# Altium PCB WiirdFlex Top Alignment.PcbDoc
Units mm, origin at the board's own origin, x right, y up, seen from the top; angles counter-clockwise.
Board outline 77.75 x 78.75 mm, 2 copper layers (Top Layer, Bottom Layer); 8 components, 1 nets, 135 pads, 0 vias.
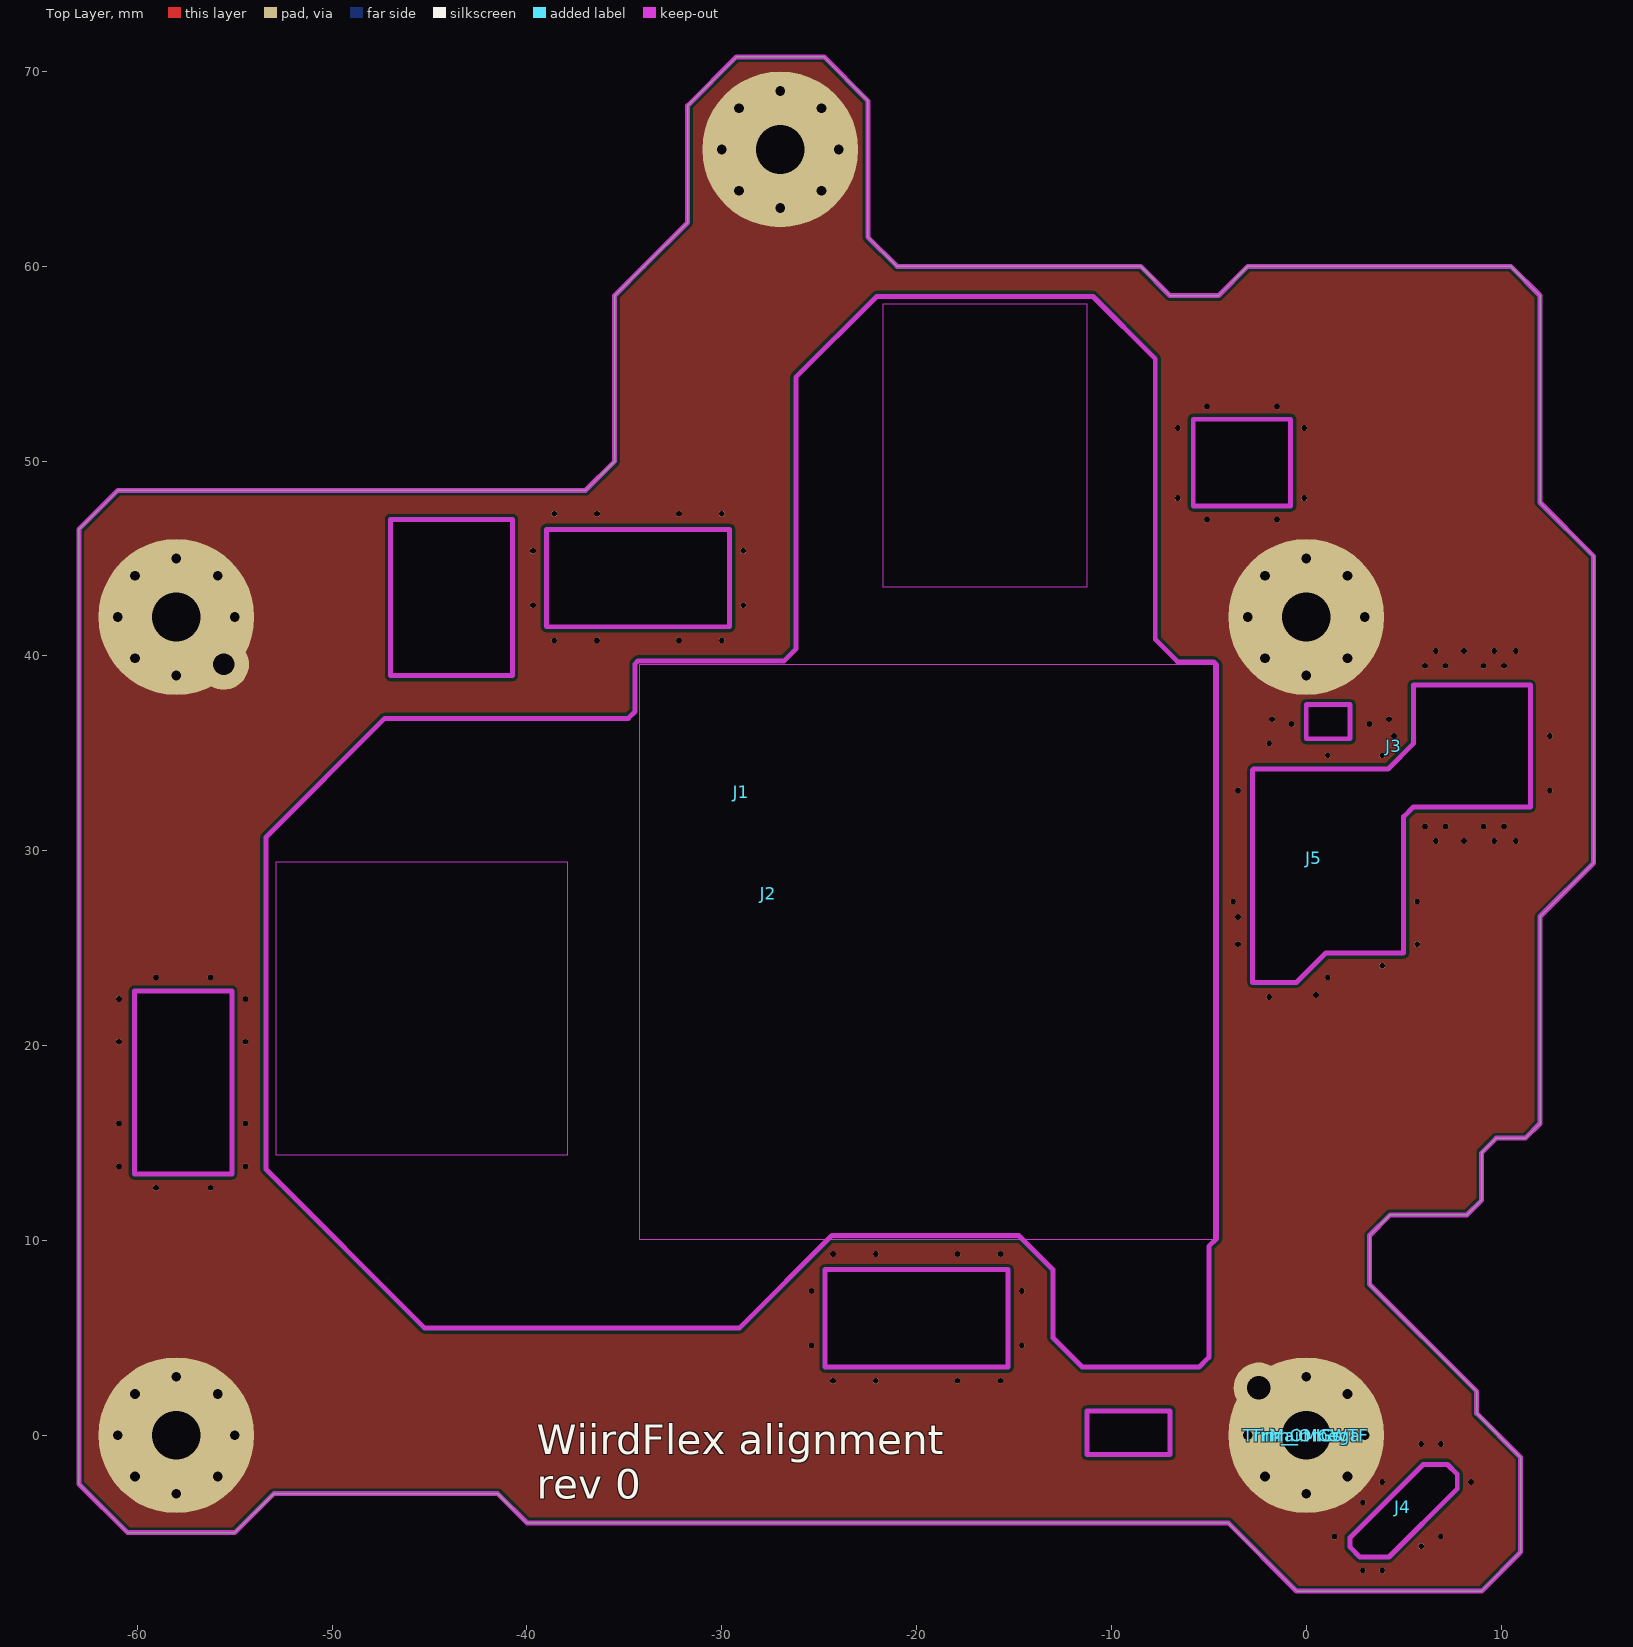
[diagram p0: Top Layer view]
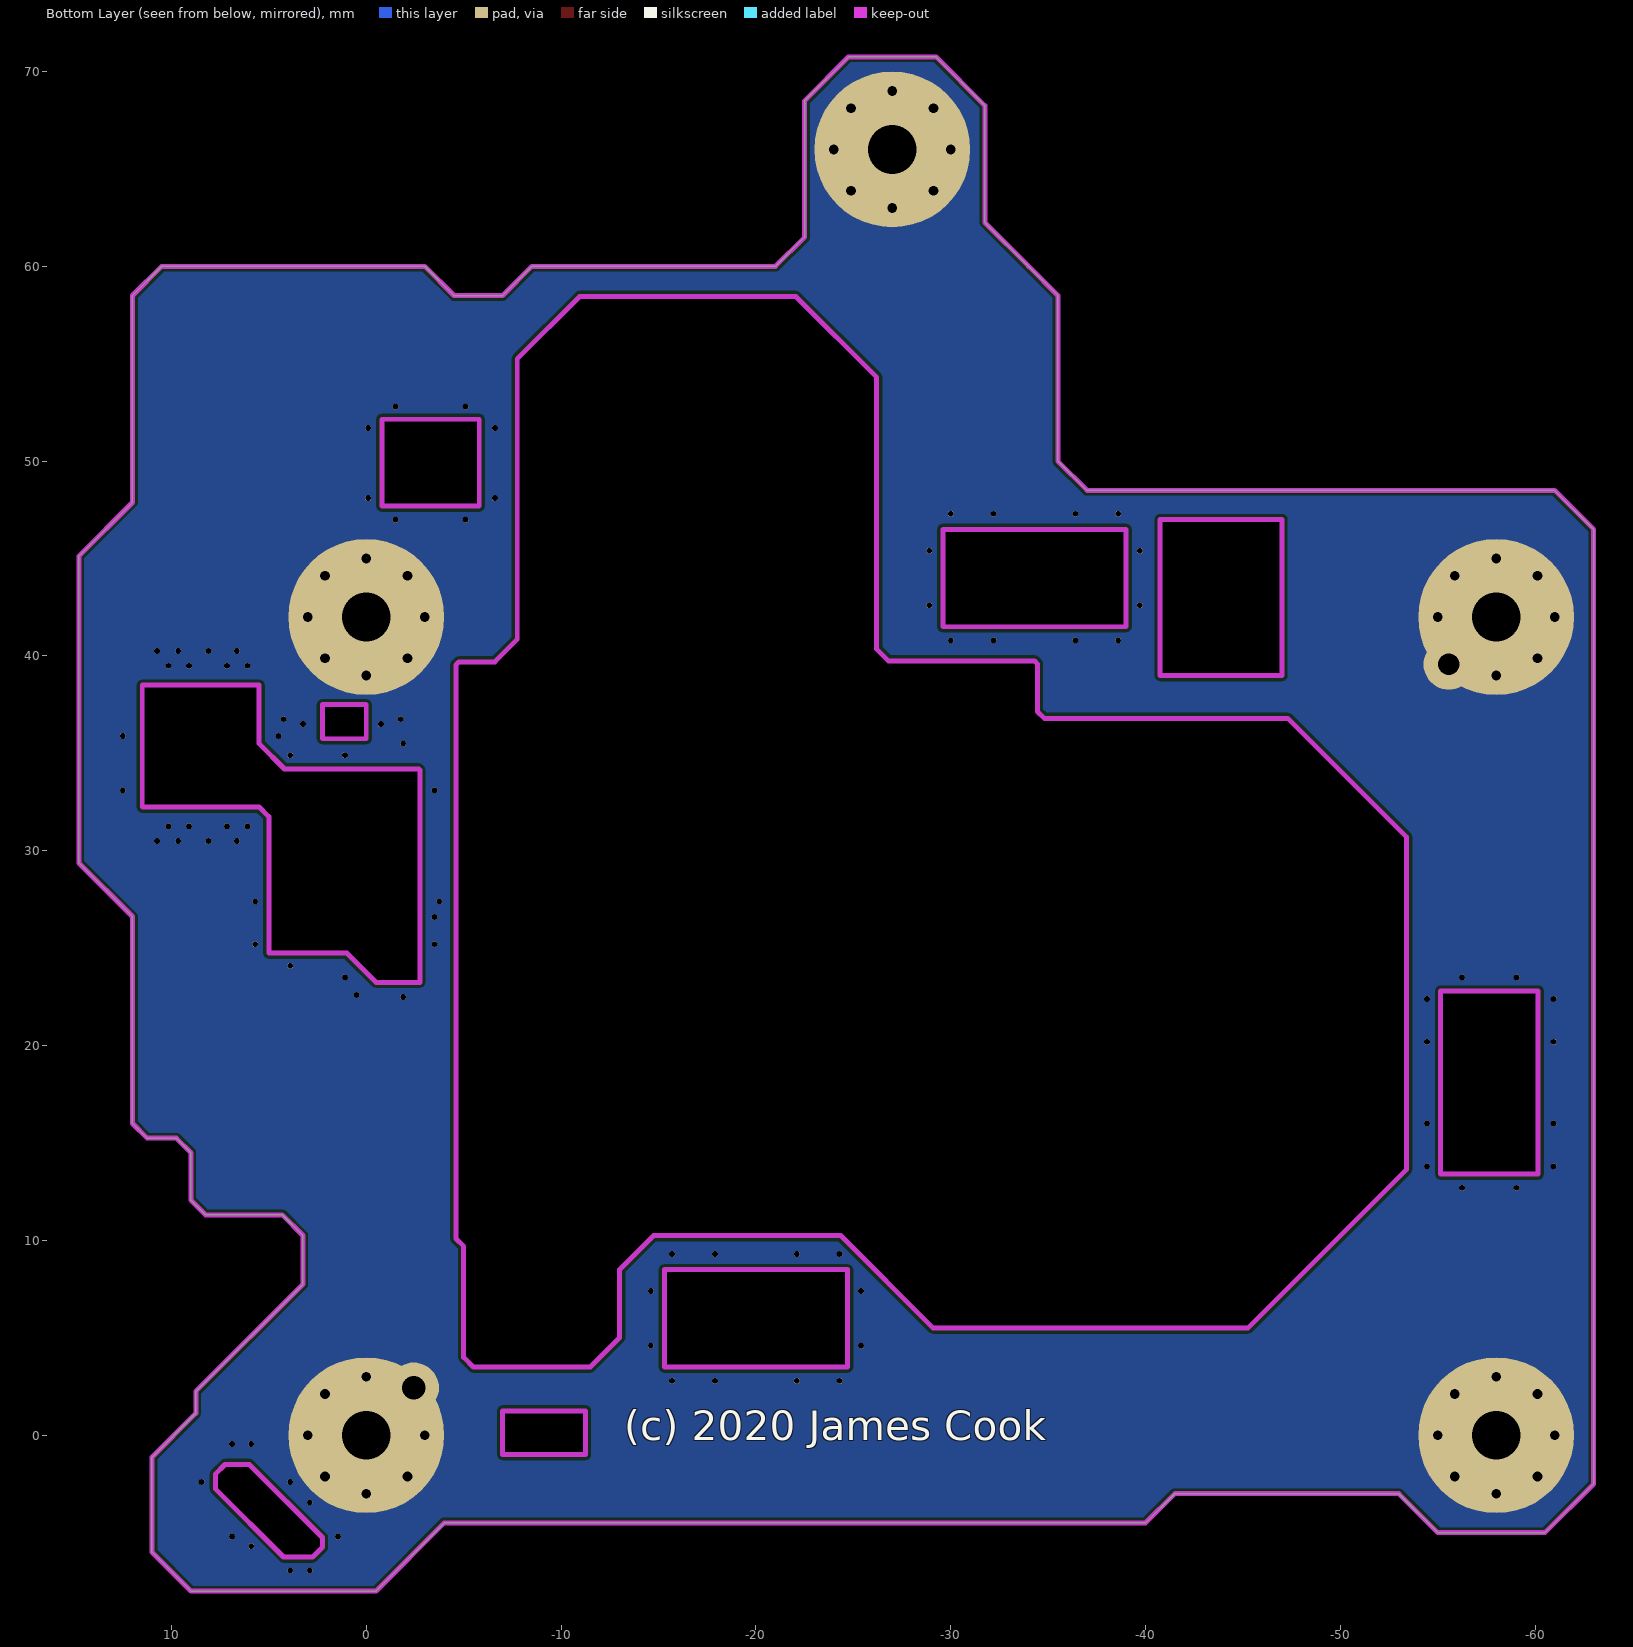
[diagram p1: Bottom Layer view, seen from below]

## Layer stack, top to bottom
Top Solder: solder mask 0.0102, Solder Resist, Dk 3.5
Top Layer: signal copper 0.0356
Dielectric 1: dielectric 0.32, FR-4, Dk 4.8
Bottom Layer: signal copper 0.0356
Bottom Solder: solder mask 0.0102, Solder Resist, Dk 3.5

## Board outline
-60.5,-5 -55,-5 -53,-3 -41.5,-3 -40,-4.5 -4,-4.5 -0.5,-8 9,-8 11,-6 11,-1.125 8.75,1.125 8.75,2.25 3.25,7.75 3.25,10.25 4.312,11.312 8.25,11.312 9,12.063 9,14.5 9.75,15.25 11.25,15.25 12,16 12,26.625 14.75,29.375 14.75,45.125 12,47.875 12,58.5 10.5,60 -3,60 -4.5,58.5 -7,58.5 -8.5,60 -21,60 -22.5,61.5 -22.5,68.5 -24.75,70.75 -26.75,70.75 -29.25,70.75 -31.75,68.25 -31.75,62.25 -34,60 -35.5,58.5 -35.5,50 -37,48.5 -61,48.5 -63,46.5 -63,-2.5
cut-out: 6,-1.5 7.25,-1.5 7.75,-2 7.75,-2.75 4.25,-6.25 2.75,-6.25 2.25,-5.75 2.25,-5.25
cut-out: 2.25,37.5 2.25,35.75 0,35.75 0,37.5
cut-out: 5.5,38.5 11.5,38.5 11.5,32.25 5.5,32.25 5,31.75 5,24.8 4.95,24.75 1,24.75 -0.5,23.25 -2.75,23.25 -2.75,34.15 -2.7,34.2 4.2,34.2 5.5,35.5
cut-out: -39,46.5 -29.6,46.5 -29.6,41.5 -39,41.5
cut-out: -5.8,52.15 -5.8,47.7 -0.8,47.7 -0.8,52.15
cut-out: -15.3,3.5 -15.3,8.5 -24.7,8.5 -24.7,3.5
cut-out: -60.15,22.8 -55.15,22.8 -55.15,13.4 -60.15,13.4
cut-out: -47,47 -40.75,47 -40.75,39 -47,39
cut-out: -5.5,3.5 -5,4 -5,9.7 -4.6,10.1 -4.6,39.54 -4.76,39.7 -6.6,39.7 -7.75,40.85 -7.75,55.25 -10.95,58.45 -22.05,58.45 -26.2,54.3 -26.2,40.35 -26.8,39.75 -34.3,39.75 -34.45,39.6 -34.45,37.15 -34.8,36.8 -47.3,36.8 -53.4,30.7 -53.4,20.7 -53.4,13.65 -45.25,5.5 -29.1,5.5 -24.35,10.25 -14.75,10.25 -13,8.5 -13,5 -11.5,3.5
cut-out: -11.25,1.25 -7,1.25 -7,-1 -11.25,-1
cut-out: -47.15,8.05

## Design rules (kind name [scope] priority, off if disabled: settings)
Clearance [All] p1: gap=0.152 ignorepadtopadclearanceinfootprint=FALSE
ComponentClearance FakeComponentClearance [InComponentClass('Keepout')] p1: gap=0 collisioncheckmode=3 verticalgap=0 showdistances=FALSE // some components are fake.  copper collisions, keepouts, etc., will still apply but component clearance is meaningless for these.
ComponentClearance [All] p2: gap=0 collisioncheckmode=3 verticalgap=0 showdistances=TRUE
HoleSize [All] p1: absolutevalues=TRUE maxlimit=5 minlimit=0.025 maxpercent=80.000 minpercent=20.000
PolygonConnect [All] p1: connectstyle=Direct reliefconductorwidth=0.254 reliefentries=4 polygonreliefangle="90 Angle" airgapwidth=0.254
RoutingVias [All] p1: holewidth=0.711 width=1.27 viastyle="Through Hole" minholewidth=0.711 minwidth=1.27 maxholewidth=0.711 maxwidth=1.27
SolderMaskExpansion [All] p1: expansion=0 istentingtop=FALSE
Width [All] p1: maxlimit=0.254 minlimit=0.254 preferedwidth=0.254
28 further rules are at their usual default settings.

## Classes and differential pairs
component class Keepout: "Main ICs"
component class "WiirdFlex Top Alignment": J1 J2 J3 J4 J5 "Main ICs"

## Components (designator, comment, footprint, x,y, rotation, side; value= is the part's Value field where it differs from the comment)
J1 "RVK-01_Ground_MountingScrews" RVK-1_GND_SCREWS 0,0 r0 top locked
J2 "RVK-1_Power_Rails" RVK-1_POWER_RAILS_TOP_ALIGNMENT 0,0 r0 top locked
J3 "RVK-1_SD_Bus" RVK-1_SD_ALIGNMENT 0,0 r0 top locked
J4 "RVK-1_USB_Both" RVK-1_USB_TOP_ALIGNMENT 0,0 r0 top locked
J5 "RVK-01_Bluetooth_Data" RVK-1_BT_DATA_ALIGNMENT 0,0 r0 top locked
"Main ICs" "Keepout" RVK-1_MAIN_IC_KEEPOUT 0,0 r0 top locked
Trim_Omega "Comment" "WII TRIM: OMEGA" 0,0 r0 top locked
Trim_OMGWTF "Comment" "WII TRIM: OMGWTF" 0,0 r0 top locked

## Footprints (in the part's own frame and the unit in brackets; to place one, negate y for a bottom-side part, rotate by r counter-clockwise, add the part's x,y. Pads: shape width x height; smd on the part's side, far side on the other; paste and mask are expansions set on the pad)
RVK-1_BT_DATA_ALIGNMENT [mm]
  round 0.3 hole 0.3 unplated mask+0: 1(-0.75,36.5) 1(3.25,36.5) 2(-1.75,36.75) 2(4.25,36.75) 3(-3.5,26.6) 3(-1.9,22.5) 3(-1.9,35.5) 3(0.5,22.6)
RVK-1_GND_SCREWS [mm]
  round 1 hole 0.5: 1(-61,0) 1(-61,42) 1(-60.121,-2.121) 1(-60.121,2.121) 1(-60.121,39.879) 1(-60.121,44.121) 1(-58,-3) 1(-58,3) 1(-58,39) 1(-58,45) 1(-55.879,-2.121) 1(-55.879,2.121) 1(-55.879,44.121) 1(-55,0) 1(-55,42) 1(-30,66) 1(-29.121,63.879) 1(-29.121,68.121) 1(-27,63) 1(-27,69) 1(-24.879,63.879) 1(-24.879,68.121) 1(-24,66) 1(-3,0) 1(-3,42) 1(-2.121,-2.121) 1(-2.121,39.879) 1(-2.121,44.121) 1(0,-3) 1(0,3) 1(0,39) 1(0,45) 1(2.121,-2.121) 1(2.121,2.121) 1(2.121,39.879) 1(2.121,44.121) 1(3,0) 1(3,42)
  round 8 hole 2.5: 1(-58,0) 1(-58,42) 1(-27,66) 1(0,0) 1(0,42)
  round 2.6 hole 1.1: 1(-55.568,39.568)
  round 2.6 hole 1.2: 1(-2.432,2.432)
RVK-1_MAIN_IC_KEEPOUT [mm]
  Top Layer keep-out region: -52.9,14.4 -37.9,14.4 -37.9,29.4 -52.9,29.4
  Top Layer keep-out region: -34.25,10.05 -4.75,10.05 -4.75,39.55 -34.25,39.55
  Top Layer keep-out region: -21.75,43.55 -11.25,43.55 -11.25,58.05 -21.75,58.05
RVK-1_POWER_RAILS_TOP_ALIGNMENT [mm] "alignment test footprint for top side power rail connection points"
  round 0.3 hole 0.3 unplated: 1(-60.95,13.8) 1(-60.95,16) 1(-59.05,12.7) 1(-59.05,23.5) 1(-56.25,12.7) 1(-56.25,23.5) 1(-54.45,13.8) 1(-54.45,16) 1(-39.7,42.6) 1(-39.7,45.4) 1(-38.6,40.8) 1(-38.6,47.3) 1(-36.4,40.8) 1(-36.4,47.3) 1(-28.9,42.6) 1(-28.9,45.4) 1(-25.4,4.6) 1(-25.4,7.4) 1(-24.3,2.8) 1(-24.3,9.3) 1(-22.1,2.8) 1(-22.1,9.3) 1(-14.6,4.6) 1(-14.6,7.4) 1(-3.75,27.4) 1(-3.5,25.2) 1(1.1,34.9) 1(3.9,24.1) 1(3.9,34.9) 1(5.7,25.2) 1(5.7,27.4) 2(-32.2,40.8) 2(-32.2,47.3) 2(-30,40.8) 2(-30,47.3) 3(-60.95,20.2) 3(-60.95,22.4) 3(-54.45,20.2) 3(-54.45,22.4) 4(-17.9,2.8) 4(-17.9,9.3) 4(-15.7,2.8) 4(-15.7,9.3) 4(-6.6,48.1) 4(-6.6,51.7) 4(-5.1,47) 4(-5.1,52.8) 4(-1.5,47) 4(-1.5,52.8) 4(-0.1,48.1) 4(-0.1,51.7) 5(1.1,23.5)
  Keep-Out Layer lines w0.254: -60.15,13.4 -60.15,22.8 -55.15,22.8 -55.15,13.4 -60.15,13.4 ; -39,41.5 -39,46.5 -29.6,46.5 -29.6,41.5 -39,41.5 ; -24.7,3.5 -24.7,8.5 -15.3,8.5 -15.3,3.5 -24.7,3.5 ; -5.8,47.7 -5.8,52.15 -0.8,52.15 -0.8,47.7 -5.8,47.7
RVK-1_SD_ALIGNMENT [mm] "alignment check footprint for SD target pads"
  round 0.3 hole 0.3 unplated: 1(-3.5,33.1) 1(6.1,31.25) 1(6.1,39.5) 1(12.5,33.1) 2(6.65,30.5) 2(6.65,40.25) 3(7.15,31.25) 3(7.15,39.5) 4(4.5,35.9) 4(8.1,30.5) 4(8.1,40.25) 4(12.5,35.9) 5(9.1,31.25) 5(9.1,39.5) 6(9.65,30.5) 6(9.65,40.25) 7(10.15,31.25) 7(10.15,39.5) 8(10.75,30.5) 8(10.75,40.25)
RVK-1_USB_TOP_ALIGNMENT [mm] "alignment test footprint for USB vias"
  round 0.3 hole 0.3 unplated: 1(1.45,-5.2) 1(3.9,-6.95) 2(2.9,-6.95) 2(2.9,-3.45) 3(3.9,-2.4) 3(5.9,-5.7) 3(5.9,-0.45) 3(8.45,-2.4) 4(6.9,-5.2) 4(6.9,-0.45)
"WII TRIM: OMEGA" [mm] "Omega trim outline, from images in ShockSlayer's post: https://bitbuilt.net/forums/index.php?threads/a-very-merwii-christmas.864/"
"WII TRIM: OMGWTF" [mm] "OMGWTF trim outline, from ShockSlayer's guide at https://bitbuilt.net/forums/index.php?threads/lmaov2-and-nand-relocation-guide.1961/"

## Part data
J2: "Connection points for Wii power rails"
"Main ICs": ClassName=Keepout

## Nets (pads, with @x,y where several pads share a name; then routed paths per layer and width w, separated by ;. In a path a pad name is that pad's centre, name@x,y a point inside that pad or via, vN(x,y) a via of type N, cw(c..) or ccw(c..) an arc to the next point about the centre after c; other vN are vias at no path point)
GND: J1.1 J2.1 J2.2 J2.3 J2.4 J2.5 J3.1 J3.2 J3.3 J3.4 J3.5 J3.6 J3.7 J3.8 J4.1 J4.2 J4.3 J4.4 J5.1 J5.2 J5.3

## Polygon pours and split planes (outlines as drawn)
GND on Bottom Layer "GND_L02_P001" (solid, remove dead copper, pour order 1): -66.25,76 15.75,76 16.25,75.5 16.25,-11.25 -66.25,-11.25
GND on Top Layer "GND_L01_P000" (solid, remove dead copper, pour order 0): -68,75.5 18,75.5 18,-14 16.5,-15.5 15,-14 -68.25,-14

## Keep-outs
Keep-Out Layer:
  lines w0.254: -63,-2.5 -63,46.5 -61,48.5 -37,48.5 -35.5,50 -35.5,58.5 -34,60 -31.75,62.25 -31.75,68.25 -29.25,70.75 -26.75,70.75 -24.75,70.75 -22.5,68.5 -22.5,61.5 -21,60 -8.5,60 -7,58.5 -4.5,58.5 -3,60 10.5,60 12,58.5 12,47.875 14.75,45.125 14.75,29.375 12,26.625 12,16 11.25,15.25 9.75,15.25 9,14.5 9,12.063 8.25,11.312 5.312,11.312 4.312,11.312 3.25,10.25 3.25,7.75 8.75,2.25 8.75,1.125 11,-1.125 11,-6 9,-8 -0.5,-8 -4,-4.5 -40,-4.5 -41.5,-3 -53,-3 -55,-5 -60.5,-5 -63,-2.5 ; -53.4,13.65 -45.25,5.5 -29.1,5.5 -24.35,10.25 -14.75,10.25 -13,8.5 -13,5 -11.5,3.5 -5.5,3.5 -5,4 -5,9.7 -4.6,10.1 -4.6,39.54 -4.76,39.7 -6.6,39.7 -7.75,40.85 -7.75,55.25 -10.95,58.45 -22.05,58.45 -26.2,54.3 -26.2,40.35 -26.8,39.75 -34.3,39.75 -34.45,39.6 -34.45,37.15 -34.8,36.8 -47.3,36.8 -53.4,30.7 -53.4,25.05 -53.4,20.7 -53.4,13.65 ; -47,39 -40.75,39 -40.75,47 -47,47 -47,39 ; -11.25,-1 -7,-1 -7,1.25 -11.25,1.25 -11.25,-1 ; -2.75,23.25 -0.5,23.25 1,24.75 5,24.75 5,31.75 5.5,32.25 11.5,32.25 11.5,38.5 5.5,38.5 5.5,35.5 4.2,34.2 -2.7,34.2 -2.75,34.15 -2.75,23.25 ; 0,35.75 0,37.5 2.25,37.5 2.25,35.75 0,35.75 ; 2.25,-5.75 2.25,-5.25 6,-1.5 7.25,-1.5 7.75,-2 7.75,-2.75 4.25,-6.25 2.75,-6.25 2.25,-5.75

## Silkscreen, mask and mechanical layers (free items; w line width, h text height)
Top Overlay:
  text "WiirdFlex alignment / rev 0" at -39.5,-3.25 h1.52
Bottom Overlay:
  text "(c) 2020 James Cook" at -13.254,-0.246 h1.52